# EAGLE board pc_healthypi_move_bottom_pcb_v4 (EAGLE 9.6.2)
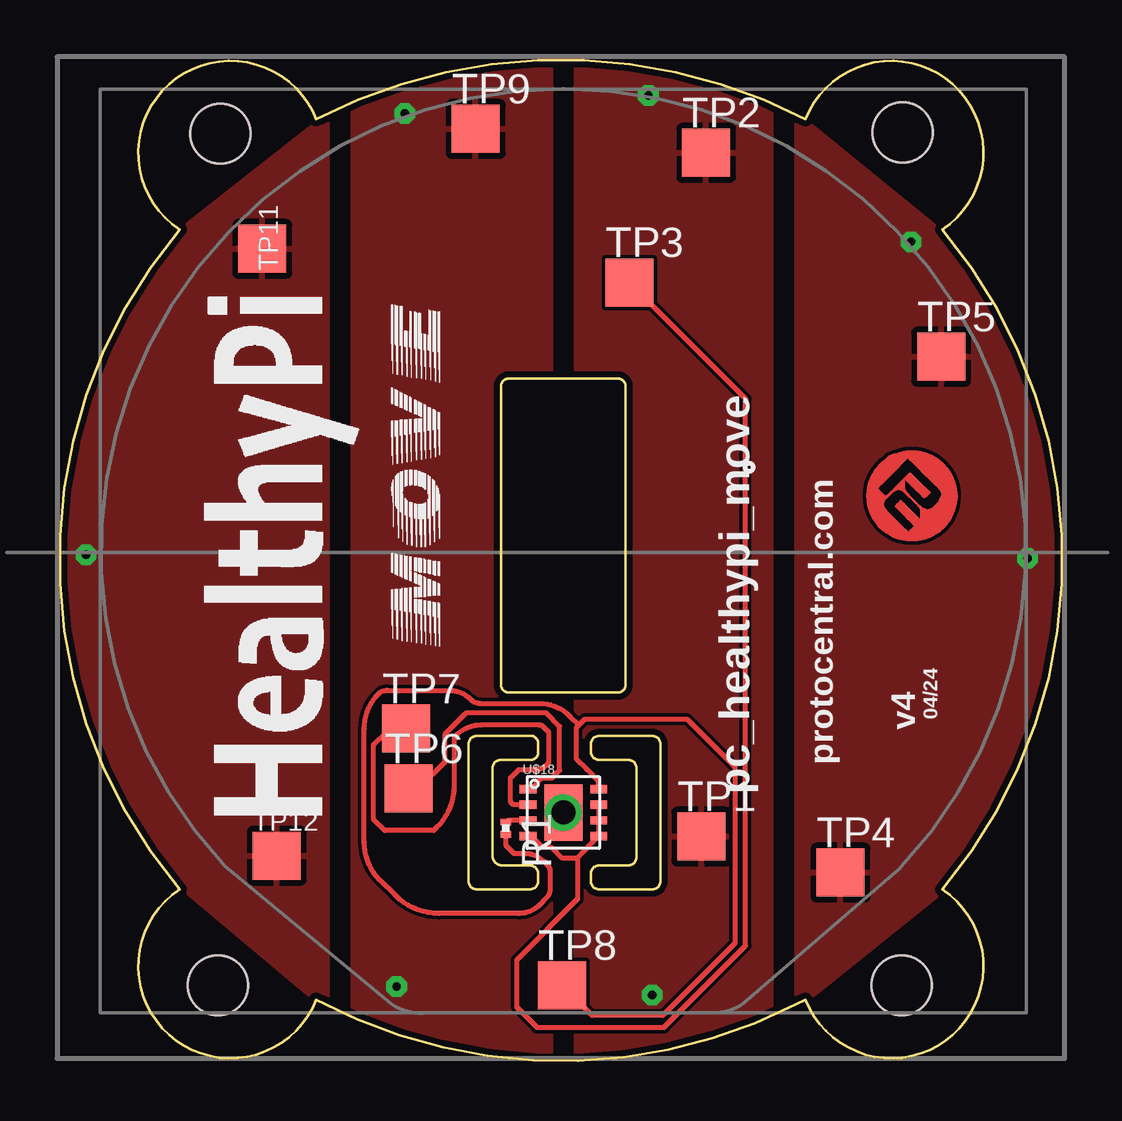
[diagram p0: board, top side]
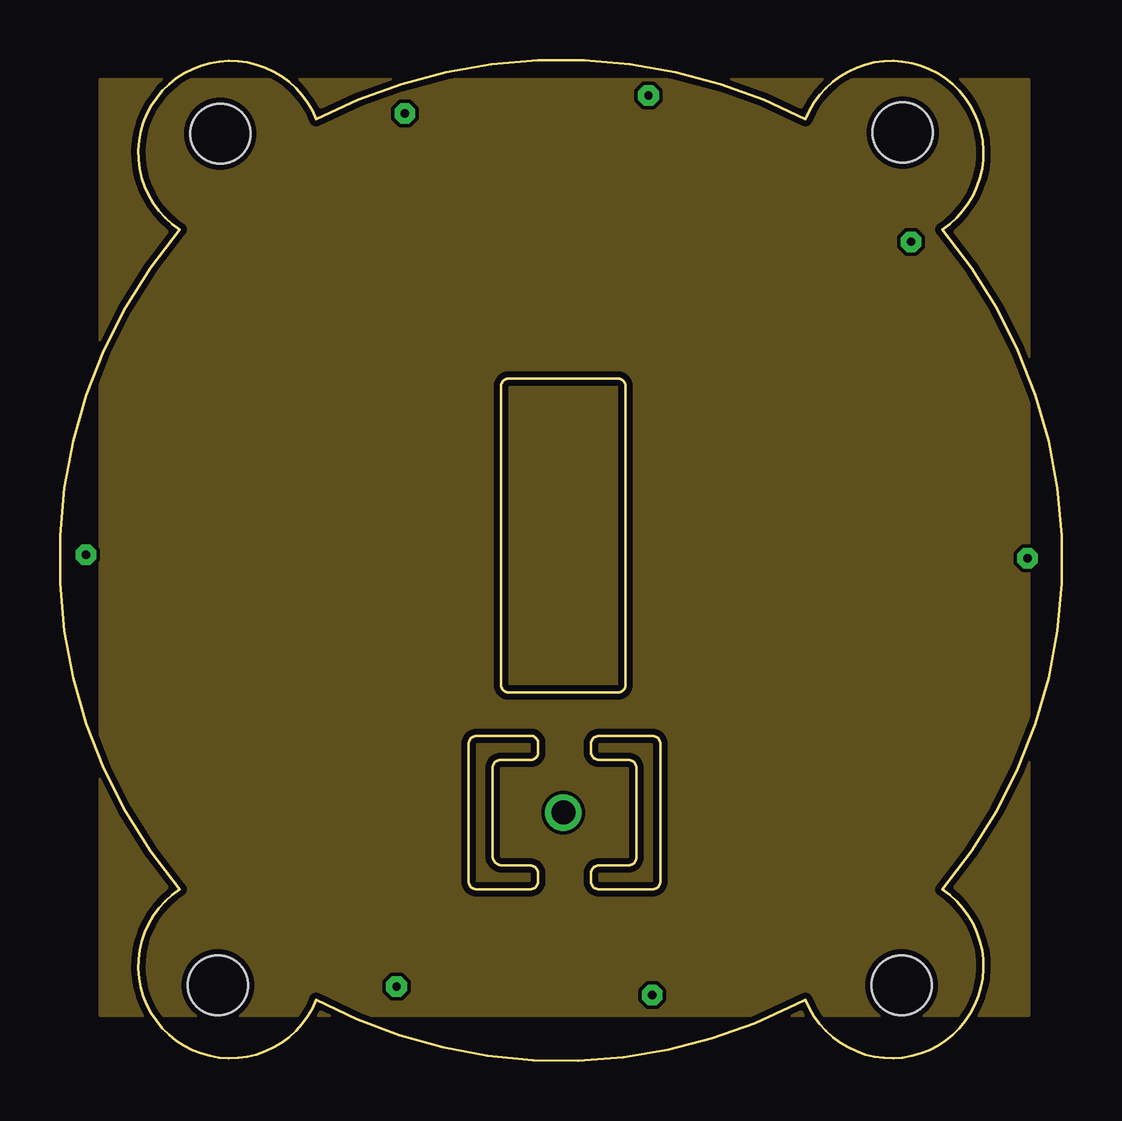
[diagram p1: board, inner layer Route2]
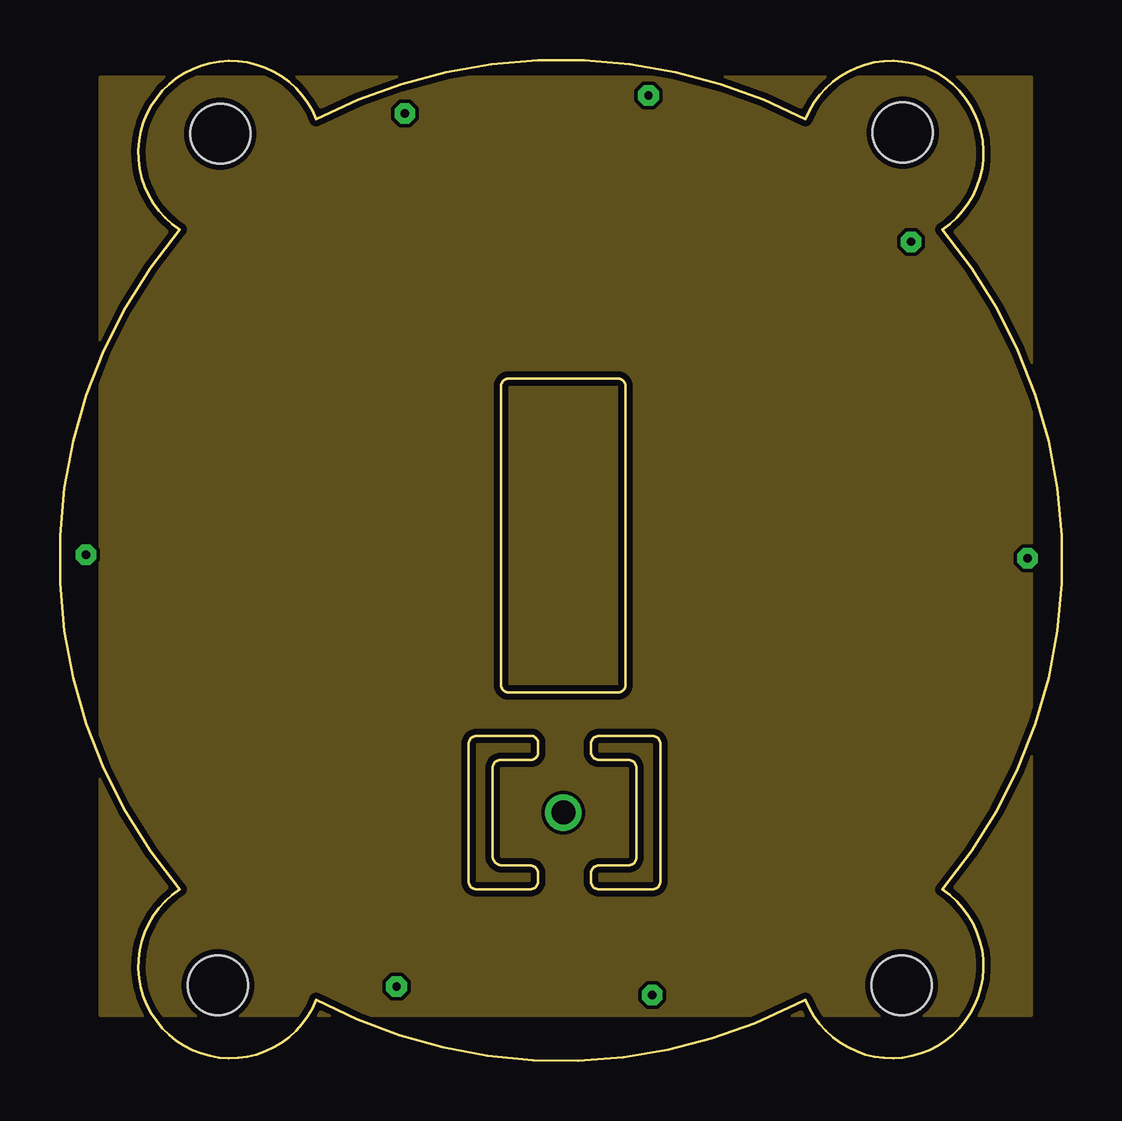
[diagram p2: board, inner layer Route15]
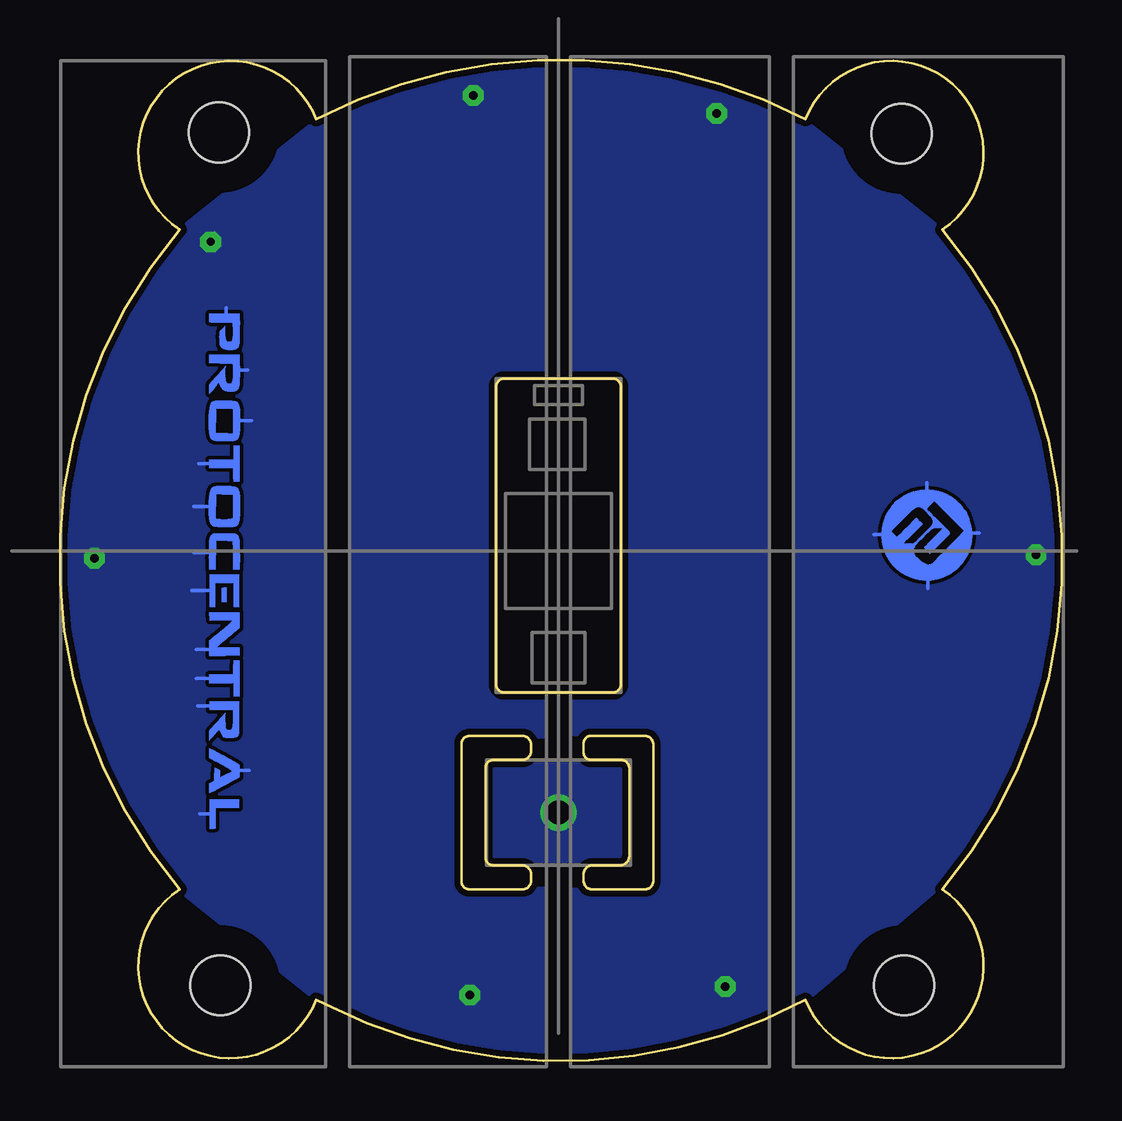
[diagram p3: board, bottom side, seen from below]

Size 41.76 x 41.71 mm. Coordinates in mm from the lower left corner, seen from the top.
Outline: 31.08,2.54 30.68,2.34 arc-55 10.68,2.54 arc-215 4.98,7.14 arc-80 4.98,34.64 arc-215 10.68,39.24 arc-55 31.08,39.24 arc-215 36.78,34.64 arc-80 36.78,7.14 arc-215 31.08,2.54
Outline: 18.03,12.19 18.03,8.54 arc90 18.43,8.14 19.58,8.14 arc-90 19.93,7.79 19.93,7.49 arc-90 19.58,7.14 17.38,7.14 arc-90 17.03,7.49 17.03,13.19 arc-90 17.38,13.54 19.63,13.54 arc-90 19.93,13.24 19.93,12.84 arc-90 19.63,12.54 18.38,12.54 arc90 18.03,12.19
Outline: 22.48,8.14 23.68,8.14 arc90 24.03,8.49 24.03,12.19 arc90 23.68,12.54 22.48,12.54 arc-90 22.13,12.89 22.13,13.19 arc-90 22.48,13.54 24.68,13.54 arc-90 25.03,13.19 25.03,7.49 arc-90 24.68,7.14 22.48,7.14 arc-90 22.13,7.49 22.13,7.79 arc-90 22.48,8.14
Outline: 18.73,15.34 23.23,15.34 arc90 23.58,15.69 23.58,28.09 arc90 23.23,28.44 18.73,28.44 arc90 18.38,28.09 18.38,15.69 arc90 18.73,15.34
Copper layers (1*16): Top 0.035mm / dielectric 0.73mm / Bottom 0.035mm
Design rules "Circuitects-Rules *": minimum track width 6mil, minimum drill 0.3mm, track to track 6mil, track to pad 6mil, pad to pad 6mil, via to via 6mil, smd to smd 6mil, copper to edge 10mil, drill to drill 8mil, minimum pad ring 12mil, minimum via ring 10mil, stop-mask expansion 4mil, vias tented up to drill 25mil, thermal gap 10mil
Net classes: 2 Clock: width 0.089 mm, clearance 0.178 mm
Holes 2.5 mm at 35.13,38.69 6.58,3.14 6.68,38.64 35.08,3.14
bRestrict: area 4.1,0.6 to 9.1,5.6; area 32.6,0.6 to 37.6,5.6; area 32.6,36.2 to 37.6,41.2; area 4.2,36.1 to 9.2,41.1

## Footprints (pad centres in the part's own frame; a part is rotated, then mirrored left to right if it is on the bottom)
R0201 = smd 0.28 x 0.43: 1 -0.255,0; 2 0.255,0
TP20SQ = smd 2 x 2: TP 0,0
TDFN-08 = smd 0.7 x 0.35: 1 -1.475,0.975; 2 -1.475,0.325; 3 -1.475,-0.325; 4 -1.475,-0.975; 5 1.475,-0.975; 6 1.475,-0.325; 7 1.475,0.325; 8 1.475,0.975 | smd 1.58 x 2.35: EXP 0,0

## Placement (x,y rotation side)
R1  10K  [R0201]  18.58,9.69 270 top
TP1  TPSQTP20SQ  [TP20SQ]  26.73,9.34 0 top
TP2  TPSQTP20SQ  [TP20SQ]  26.93,37.84 0 top
TP3  TPSQTP20SQ  [TP20SQ]  23.73,32.44 0 top
TP4  TPSQTP20SQ  [TP20SQ]  32.53,7.84 0 top
TP5  TPSQTP20SQ  [TP20SQ]  36.73,29.34 0 top
TP6  TPSQTP20SQ  [TP20SQ]  14.53,11.34 0 top
TP7  TPSQTP20SQ  [TP20SQ]  14.43,13.84 0 top
TP8  TPSQTP20SQ  [TP20SQ]  20.93,3.14 0 top
TP9  TPSQTP20SQ  [TP20SQ]  17.33,38.84 0 top
TP11  TPSQTP20SQ  [TP20SQ]  8.43,33.84 0 top
TP12  TPSQTP20SQ  [TP20SQ]  9.03,8.54 0 top
U$1  [PCROUNDLOGO_GOLD]  7.88,24.74 270 bottom
U$2  [HEALTHYPI_MOVE_LOGO]  15.78,10.24 90 top
U$3  [HEALTHYPI_MOVE_LOGO_1]  18.43,16.44 90 top
U$4  [PC_LOGO_NAME]  35.98,31.99 270 bottom
U$18  MAX30205MTA+  [TDFN-08]  20.98,10.34 0 top
U$51  [PCROUNDLOGO_GOLD]  32.68,21.29 0 top

## Library data of the parts
R1 = rcl; SPICEPREFIX: R
TP1-TP9 TP11 TP12 = testpad
U$1-U$4 U$18 U$51 = circuitects

## Nets
+3V3: R1.2 TP8.TP U$18.8
ECGN: TP9.TP
GND: TP3.TP U$18.4 U$18.5 U$18.6 U$18.7
GSR_PAD1: TP11.TP TP12.TP
GSR_PAD2: TP4.TP TP5.TP
N$1: R1.1 U$18.3
SCL: TP7.TP U$18.2
SDA: TP6.TP U$18.1
THERM: U$18.EXP
VCM: TP1.TP TP2.TP

## Tracks (layer width: path | path; a pad name or v marks a point on that pad's centre or on a via)
1.8V
  pour Route2: 40.38,40.89 1.68,40.89 1.68,1.89 40.38,1.89
+3V3
  Top 0.2: U$18.8 22.46,11.66 21.99,12.13 21.96,12.13 21.53,12.56 21.53,13.89 21.63,13.99 | TP8.TP 22.18,1.89 25.13,1.89 28.13,4.89 28.13,12.24 26.13,14.24 21.88,14.24 21.63,13.99 | R1.2 18.58,8.99 18.93,8.64 19.38,8.64 arc-45 20.15,8.32 20.33,8.14 arc-45 20.43,7.89 20.43,7.14 arc-45 20.29,6.79 19.98,6.49 arc-45 19.14,6.14 15.78,6.14 arc-45 13.99,6.88 13.33,7.54 arc-45 12.68,9.1 12.68,13.84 arc-45 13.28,15.29 arc-45 13.64,15.44 16.24,15.44 arc-45 17.08,15.09 arc45 17.56,14.89 20,14.89 arc-45 21.25,14.37 21.63,13.99
ECGN  (via drill 0.35)
  other vias: 14.03,3.09 14.38,39.49
  pour Bottom: 12.18,-0.26 20.48,-0.26 20.48,7.14 17.03,7.14 17.03,13.59 20.48,13.59 20.48,41.84 12.18,41.84
  pour Top: 12.18,-0.31 20.48,-0.31 20.48,41.84 12.18,41.84
GND
  Top 0.2: 19.58,9.36 U$18.4 19.63,9.36 20.09,8.91 20.46,8.91 20.93,8.44 21.38,8.44 21.53,8.44 | TP3.TP 28.58,27.59 28.58,4.79 25.18,1.39 19.88,1.39 19.03,2.24 19.03,4.19 21.58,6.74 21.58,8.44 21.53,8.44 | 21.53,8.44 U$18.5 U$18.6 U$18.7
  pour Route15: 40.48,40.99 1.68,40.99 1.68,1.89 40.48,1.89
GSR_PAD1  (via drill 0.35)
  Bottom 0.152: 5.63,23.69 5.63,24.09 | 3.43,21.99 3.88,21.99 | 5.58,19.69 5.58,20.14 | 7.38,21.94 7.83,21.94
  other vias: 1.08,21.09
  pour Bottom: 11.18,39.29 11.18,2.24 10.93,2.24 4.28,7.88 -0.11,12.28 -0.11,13.13 -0.06,34.64 4.93,34.64 4.94,34.63 10.82,39.29
  pour Top: 11.03,2.29 11.18,2.29 11.18,39.39 11.03,39.39 4.99,34.64 -0.22,34.64 -0.12,12.54 -0.12,12.44 -0.12,12.19 4.1,7.96 10.97,2.22
GSR_PAD2  (via drill 0.35)
  Bottom 0.152: 35.43,10.29 35.93,10.29 | 34.38,12.09 33.88,12.09 | 35.38,14.79 36.03,14.79 | 35.43,15.94 36.08,15.94 | 35.48,17.14 36.08,17.14 | 35.48,19.59 36.28,19.59 | 35.43,21.14 35.48,21.19 36.18,21.19 | 35.48,23.09 36.18,23.09 | 35.28,24.89 35.98,24.89 | 34.43,26.69 33.78,26.69 | 33.93,28.79 34.38,28.79 | 34.83,31.39 34.83,31.04
  other vias: 40.33,20.94 35.48,34.14
  pour Bottom: 30.68,2.44 31.13,2.44 30.98,2.44 36.84,7.12 36.83,7.14 41.73,7.14 41.68,30.49 41.68,30.87 41.59,30.94 41.45,30.94 30.79,39.44 30.68,39.44
  pour Top: 30.68,2.44 30.93,2.44 31.08,2.44 36.88,7.09 41.98,7.09 41.98,29.59 38.07,33.5 30.79,39.44 30.68,39.44
N$1
  Top 0.2: U$18.3 18.65,10.01 R1.1
SCL
  Top 0.2: 14.88,13.34 14.62,13.63 | 14.62,13.63 TP7.TP | 14.62,13.63 13.52,13.63 13.08,13.19 13.08,10.04 13.53,9.59 15.58,9.59 15.69,9.69 arc45 16.43,11.49 16.43,13.41 arc-45 16.48,13.54 arc-45 17.57,13.99 19.98,13.99 arc-45 20.15,13.91 20.38,13.69 20.38,12.44 20.25,12.3 arc-45 19.83,12.13 19.13,12.13 18.78,11.79 18.78,10.79 18.91,10.66 U$18.2
SDA
  Top 0.2: U$18.1 19.61,11.31 20.08,11.79 20.53,11.79 20.83,12.09 20.83,13.94 20.28,14.49 16.93,14.49 16.03,13.59 16.03,12.44 14.93,11.34 TP6.TP
THERM  (via drill 1)
  other vias: 20.98,10.34
  pour Bottom: 18.33,8.14 24.03,8.14 24.03,12.54 18.03,12.54 18.03,8.34 18.03,8.14
VCM  (via drill 0.35)
  other vias: 24.68,2.74 24.53,40.24
  pour Bottom: 21.48,-0.26 29.68,-0.26 29.68,41.84 21.48,41.84 21.48,13.49 25.08,13.49 25.08,7.19 21.48,7.19
  pour Top: 21.48,-0.26 29.68,-0.26 29.68,41.84 21.48,41.84

## Text on the board
tPlace: pc_healthypi_move | v4 | 04/24 | protocentral.com